# EAGLE board RadioMusic_B Rev2 (EAGLE 6.6.0)
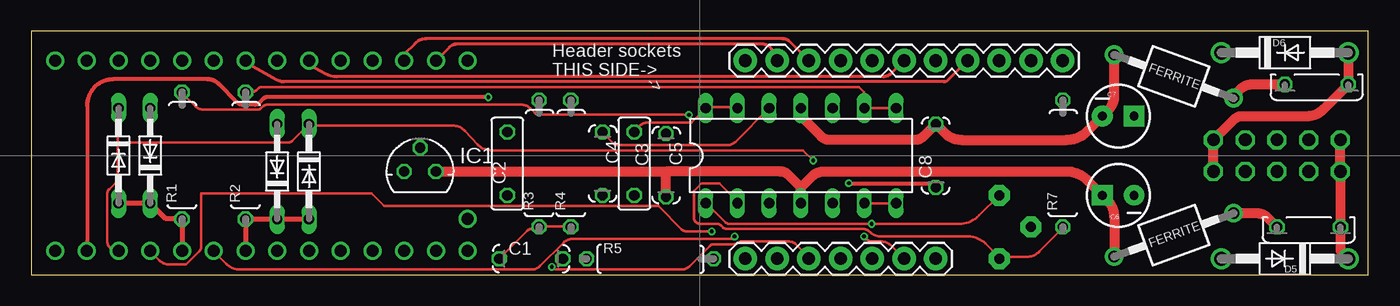
[diagram p0: board, top side]
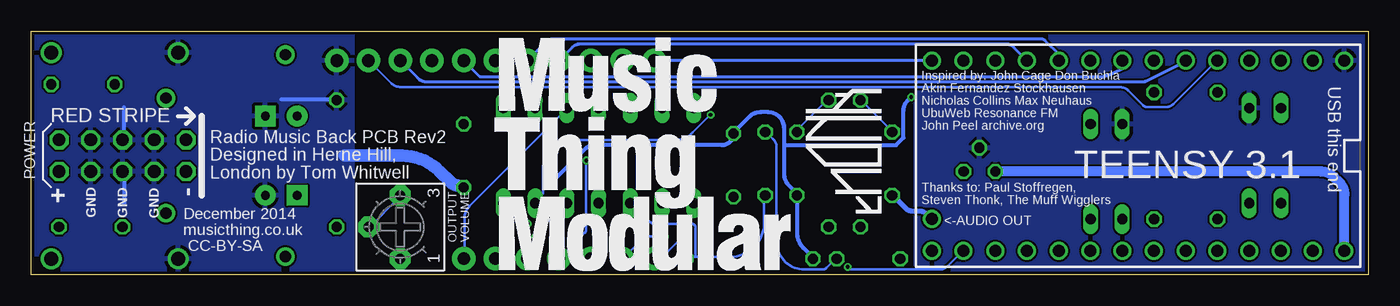
[diagram p1: board, bottom side, seen from below]

Size 107 x 19.5 mm. Coordinates in mm from the lower left corner, seen from the top.
Outline: 0,19.5 0,0 107,0 107,19.5 0,19.5
Copper layers (1*2*15*16): Top 0.035mm / dielectric 0.2mm / Route2 0.0175mm / dielectric 1.1mm / Route15 0.0175mm / dielectric 0.2mm / Bottom 0.035mm
Design rules "SeeedStudio_DRU_no_angle_20130527": minimum track width 6mil, minimum drill 12mil, track to track 6mil, track to pad 6mil, pad to pad 6mil, via to via 6mil, smd to smd 0mil, copper to edge 10mil, drill to drill 10mil, minimum pad ring 6mil, minimum via ring 6mil, stop-mask expansion 2mil, vias tented up to drill 25mil, thermal gap 10mil
Net classes: 0 default: width 0.203 mm; 1 power: width 0.305 mm; 2 ground: width 0.305 mm

## Footprints (pad centres in the part's own frame; a part is rotated, then mirrored left to right if it is on the bottom)
C050-024X044 = drill 0.813 octagon: 1 -2.54,0; 2 2.54,0
C050-025X075 = drill 0.813 octagon: 1 -2.54,0; 2 2.54,0
CPOL-RADIAL-10UF-25V = drill 0.7 pad 1.651 square: 1 1.27,0 | drill 0.7 pad 1.651: 2 -1.27,0
DO34-7 = drill 0.813 long: A 3.81,0; C -3.81,0
DO41-10 = drill 1.118: A 5.08,0; C -5.08,0
C050H075X075 = drill 0.813 octagon: 1 -2.54,0; 2 2.54,0
78LXX = drill 0.813 octagon: GND 0,1.905; IN 1.27,0; OUT -1.27,0
DIL14 = drill 0.813 long: 1 -7.62,-3.81; 2 -5.08,-3.81; 3 -2.54,-3.81; 4 0,-3.81; 5 2.54,-3.81; 6 5.08,-3.81; 7 7.62,-3.81; 8 7.62,3.81; 9 5.08,3.81; 10 2.54,3.81; 11 0,3.81; 12 -2.54,3.81; 13 -5.08,3.81; 14 -7.62,3.81
1X11 = drill 1.016 pad 1.88: 1 0,0; 2 2.54,0; 3 5.08,0; 4 7.62,0; 5 10.16,0; 6 12.7,0; 7 15.24,0; 8 17.78,0; 9 20.32,0; 10 22.86,0; 11 25.4,0
1X07 = drill 1.016 pad 1.88: 1 0,0; 2 2.54,0; 3 5.08,0; 4 7.62,0; 5 10.16,0; 6 12.7,0; 7 15.24,0
BL01RN1A = drill 0.9 pad 1.5: 1 -5.08,0; 2 5.08,0
3362P = drill 0.813 pad 1.676 octagon: 1 -2.54,0; 2 0,2.54; 3 2.54,0
0207/10 = drill 0.813 octagon: 1 -5.08,0; 2 5.08,0
MA05-2 = drill 1.016 octagon: 1 -5.08,-1.27; 2 -5.08,1.27; 3 -2.54,-1.27; 4 -2.54,1.27; 5 0,-1.27; 6 0,1.27; 7 2.54,-1.27; 8 2.54,1.27; 9 5.08,-1.27; 10 5.08,1.27
TEENSY_3.1_TW = drill 0.965: 0 -7.62,13.97; 1 -7.62,11.43; 2 -7.62,8.89; 3 -7.62,6.35; 3.3V 7.62,11.43; 4 -7.62,3.81; 5 -7.62,1.27; 6 -7.62,-1.27; 7 -7.62,-3.81; 8 -7.62,-6.35; 9 -7.62,-8.89; 10 -7.62,-11.43; 11 -7.62,-13.97; 12 -7.62,-16.51; 13 7.62,-16.51; 14/A0 7.62,-13.97; 15/A1 7.62,-11.43; 16/A2 7.62,-8.89; 17/A3 7.62,-6.35; 18/A4 7.62,-3.81; 19/A5 7.62,-1.27; 20/A6 7.62,1.27; 21/A7 7.62,3.81; 22/A8 7.62,6.35; 23/A9 7.62,8.89; AGND 7.62,13.97; DAC 5.08,-16.51; GND -7.62,16.51; VIN 7.62,16.51

## Placement (x,y rotation side)
C1  1n  [C050-024X044]  40.01,1.27 0 top
C2  100n  [C050-025X075]  38.1,8.89 90 top
C3  100n  [C050-025X075]  48.26,8.89 270 top
C4  1n  [C050-024X044]  45.72,8.89 270 top
C5  100n  [C050-024X044]  50.8,8.76 270 top
C6  10uf  [CPOL-RADIAL-10UF-25V]  87,6.35 180 top
C7  10uf  [CPOL-RADIAL-10UF-25V]  87,12.7 0 top
C8  100n  [C050-024X044]  72.39,9.53 90 top
D1  BAT42  [DO34-7]  6.99,9.53 270 top
D2  BAT42  [DO34-7]  9.53,9.53 90 top
D3  BAT42  [DO34-7]  22.23,8.26 270 top
D4  BAT42  [DO34-7]  19.68,8.26 90 top
D5  1N4001  [DO41-10]  100.33,1.27 180 top
D6  1N4001  [DO41-10]  100.33,17.78 0 top
F1  FUSE  [C050H075X075]  102.23,3.81 180 top
F2  FUSE  [C050H075X075]  102.87,15.24 180 top
IC1  [78LXX]  31.11,8.26 0 top
IC4  TL074  [DIL14]  61.59,9.53 0 top
JP1  M11PTH  [1X11]  82.55,17.14 180 top
JP3  [1X07]  57.15,1.27 0 top
L1  BL01RN1A  [BL01RN1A]  91.44,3.17 20 top
L2  BL01RN1A  [BL01RN1A]  91.44,15.88 340 top
OUTPUT  50k  [3362P]  77.47,3.81 90 bottom
R1  47R  [0207/10]  12.06,9.53 90 top
R2  47R  [0207/10]  17.14,9.53 90 top
R3  8.2k  [0207/10]  40.64,8.89 90 top
R4  8.2k  [0207/10]  43.18,8.89 90 top
R5  330K  [0207/10]  49.53,1.27 0 top
R7  1k  [0207/10]  82.55,8.89 90 top
SV1  [MA05-2]  99.69,9.53 180 bottom
U1  TEENSY_3.1_TW  [TEENSY_3.1_TW]  18.41,9.53 270 bottom
U$2  [THONK_1CM_SCREENPRINT]  38.96,4.9 90 bottom
U$4  [MTM_2CM]  70.08,-0.64 0 bottom

## Library data of the parts
C1-C5 C8 F1 F2 R1-R5 R7 U1 = TomW
C6 C7 = SparkFun-Passives
D1-D6 = diode
IC1 = v-reg
IC4 = linear
JP1 JP3 = SparkFun-Connectors
L1 L2 = inductors
OUTPUT = bourns
SV1 = TomW; OC_FARNELL: unknown; OC_NEWARK: unknown
U$2 U$4 = TW_logos

## Nets
+3.3V: D1.C D3.C JP3.4 U1.3.3V
+5V: IC1.OUT U1.VIN
+12V [power]: C5.2 C6.1 IC1.IN IC4.4 L1.1
+12V_INLET [power]: D5.C F1.1 SV1.9 SV1.10
-12V [power]: C7.2 C8.2 IC4.11 L2.1
-12V_INLET [power]: D6.A F2.1 SV1.1 SV1.2
AUDIO_OUT: IC4.1 JP3.5 OUTPUT.2 OUTPUT.3
CHANNEL_CV: IC4.5 JP3.6
CHANNEL_POT: JP3.1 U1.23/A9
DAC: C2.1 U1.DAC
DGND: D2.A D4.A IC1.GND U1.GND
GND [ground]: C4.2 C5.1 C6.2 C7.1 C8.1 D5.A D6.C JP1.1 R5.1 R7.2 SV1.3 SV1.4 SV1.5 SV1.6 SV1.7 SV1.8 U1.AGND
LED1: JP1.2 U1.3
LED2: JP1.3 U1.4
LED3: JP1.4 U1.5
LED4: JP1.5 U1.6
LED_RESET: JP1.10 U1.11
MISO: JP1.11 U1.12
MOSI: JP1.6 U1.7
N$1: IC4.8 IC4.9 R2.2
N$2: C4.1 IC4.12 R4.2
N$3: IC4.6 IC4.7 R1.2
N$4: C1.1 R3.1 R4.1
N$5: C1.2 C3.1 IC4.13 IC4.14
N$6: C3.2 IC4.3 R5.2
N$7: IC4.2 OUTPUT.1 R7.1
N$10: C2.2 R3.2
N$22 [power]: F1.2 L1.2
N$23 [power]: F2.2 L2.2
PIN20/A6: D3.A D4.C R2.1 U1.20/A6
PIN22/A8: D1.A D2.C R1.1 U1.22/A8
RESET_CV: JP1.8 U1.9
RESET_SW: JP1.7 U1.8
SCLK: JP3.3 U1.14/A0
SS: JP1.9 U1.10
TIME_CV: IC4.10 JP3.7
TIME_POT: JP3.2 U1.21/A7

## Tracks (layer width: path | path; a pad name or v marks a point on that pad's centre or on a via)
+3.3V  (via drill 0.3)
  Top 0.203: v62.59,9.14 61.77,9.96 36.79,9.96 arc-47 35.71,10.43 34.71,11.51 arc47 33.74,11.94 22.35,11.94 D3.C 20.86,10.7 arc-45 20.53,10.57 6.91,10.57 | 6.91,10.57 6.91,7.52 arc-90 6.71,7.32 6.22,6.83 arc45 6.1,6.53 6.1,2.6 arc90 6.66,2.03 6.91,2.03 U1.3.3V | 6.91,10.57 6.91,13.21 D1.C
  Bottom 0.203: v62.59,9.14 62.59,3.64 arc45 62.72,3.32 JP3.4
+5V
  Bottom 0.813: U1.VIN 1.91,6.4 arc-45 2.32,7.4 2.76,7.84 arc-45 3.76,8.26 IC1.OUT
+12V
  Top 0.813: L1.1 86.67,4.64 arc45 86.12,5.95 C6.1 84.49,7.58 arc45 82.87,8.26 63.45,8.26 arc45 62.45,7.84 61.59,6.99 | IC4.4 61.59,6.99 | 61.59,6.99 60.59,7.99 arc45 59.95,8.26 50.8,8.26 | C5.2 50.8,8.26 | IC1.IN 50.8,8.26
+12V_INLET
  Top 0.813: SV1.9 SV1.10 F1.1 104.78,1.91 D5.C
-12V
  Top 0.813: L2.1 86.67,14.31 arc-45 86.19,13.17 C7.2 84.49,11.47 arc-45 82.87,10.79 74.45,10.79 arc-45 73.1,11.35 C8.2 71.38,11.06 arc-45 70.75,10.79 63.87,10.79 arc-45 63.24,11.06 61.59,12.7 IC4.11
-12V_INLET
  Top 0.813: D6.A F2.1 103.4,13.23 arc-45 102.13,12.7 96.89,12.7 arc45 96.26,12.44 SV1.1 SV1.2
AUDIO_OUT  (via drill 0.3)
  Top 0.203: OUTPUT.3 75.84,4.72 arc-45 74.25,4.06 v67.26,4.06 55.86,4.06 arc-45 55.55,4.19 54.05,5.69 IC4.1
  Bottom 0.203: OUTPUT.2 79.86,3.86 77.62,6.1 77.62,6.3 OUTPUT.3 | v67.26,4.06 67.26,1.42 JP3.5
CHANNEL_CV  (via drill 0.3)
  Top 0.203: v66.65,3.05 66.88,2.81 arc45 67.3,2.64 68.1,2.64 arc-45 68.75,2.38 JP3.6
  Bottom 0.203: v66.65,3.05 66.65,3.25 64.21,5.69 IC4.5
CHANNEL_POT  (via drill 0.3)
  Top 0.203: v54.46,3.45 52.47,3.45 arc-45 52.05,3.63 50.19,5.49 28.25,5.49 27.23,6.5 13.61,6.5 13.61,2.27 arc-45 13.45,1.86 12.39,0.81 11.03,0.81 arc-45 10.24,1.14 9.55,1.83 U1.23/A9
  Bottom 0.203: v54.46,3.45 56.49,1.42 57.1,1.42 JP3.1
DAC
  Bottom 0.203: 38,6.3 C2.1
  Bottom 0.406: U1.DAC 35.3,4.82 arc-45 35.93,5.08 36.52,5.08 arc45 36.97,5.27 38,6.3
DGND
  pour Bottom: -1.27,-1.27 36.2,-1.27 36.2,20.95 -1.27,20.95
GND  (via drill 0.3)
  Top 0.305: v36.58,14.22 18.88,14.22 arc45 18.57,14.1 18.22,13.75 arc-45 17.89,13.61 16.91,13.61 arc-45 16.49,13.79 14.99,15.29 arc45 14.12,15.65 6.56,15.65 arc90 4.47,13.56 4.47,2.03 U1.AGND | v65.43,7.32 72.14,7.32 72.34,7.11 C8.1
  Bottom 0.305: 99.57,5.69 99.57,8.13 SV1.6 | 95.3,1.42 D5.A | 99.57,10.97 99.57,13.41 | 95.3,17.68 D6.C | 72.54,7.11 C8.1 | 82.5,17.07 JP1.1 | 86.97,14.02 82.7,14.02 R7.2 | 88.19,12.8 C7.1 | R5.1 44.5,1.42 45.22,2.14 arc45 45.72,3.36 C4.2 45.72,6.5 46.37,7.15 arc45 46.74,8.04 46.74,10.36 | 46.74,10.36 46.74,11.71 arc-90 48.03,13.01 48.63,13.01 arc-45 49.56,12.62 50.8,11.38 C5.1 arc90 51.74,10.36 61.91,10.36 arc-45 62.72,10.03 v65.43,7.32 | v36.58,14.22 36.88,13.92 arc-45 37.19,13.18 37.19,10.97 37.8,10.36 46.74,10.36
  Bottom 1.016: 72.54,7.11 72.68,7.11 arc45 73.49,7.45 74.32,8.28 arc-45 77.33,9.53 81.92,9.53
  pour Bottom: 81.28,20.32 107.95,20.32 107.95,-1.27 81.28,-1.27
LED1
  Bottom 0.203: U1.3 12.12,17.14 15.6,13.66 arc45 16.21,13.41 17.65,13.41 arc45 18.05,13.58 19.19,14.72 arc-45 19.95,15.04 77.51,15.04 arc45 78.18,15.31 JP1.2
LED2
  Bottom 0.254: JP1.3 76.09,15.76 arc-45 75.32,15.44 18.16,15.44 arc-27 17.63,15.57 14.61,17.09 U1.4
LED3
  Top 0.254: JP1.4 73.37,15.58 arc-45 73.03,15.44 20.21,15.44 arc-29 19.65,15.59 17.14,16.99 U1.5
LED4
  Bottom 0.254: JP1.5 71.12,15.88 arc-90 71.09,15.85 21.41,15.85 arc-24 20.88,15.96 19.68,16.48 U1.6
LED_RESET
  Top 0.254: U1.11 33.47,18.23 arc-45 34.11,18.49 58.5,18.49 arc-52 59.19,18.16 59.69,17.53 JP1.10
MISO
  Bottom 0.254: U1.12 JP1.11
MOSI
  Top 0.254: JP1.6 68.82,16.11 arc-45 68.18,15.85 24.46,15.85 arc-28 23.55,16.08 22.23,16.79 U1.7
N$1
  Top 0.203: R2.2 17.59,14.61 arc45 18.04,14.79 18.16,14.9 arc-45 18.47,15.04 66.24,15.04 66.65,14.63 66.65,13.36 IC4.9 IC4.8
N$2
  Top 0.203: IC4.12 56.36,10.64 arc-45 55.69,10.36 46.94,10.36 arc-45 46.59,10.51 45.72,11.38 C4.1
  Bottom 0.203: C4.1 45.72,11.58 43.28,14.02 R4.2
N$3  (via drill 0.3)
  Top 0.203: IC4.6 66.85,5.69 69.09,5.69 IC4.7 | v52.63,12.8 40.67,12.8 arc-45 40.27,12.97 39.9,13.34 arc45 39.23,13.61 18.88,13.61 arc45 18.56,13.48 18.44,13.36 arc-45 18.07,13.21 13.8,13.21 arc-45 13.13,13.48 12.19,14.43 R1.2
  Bottom 0.203: v52.63,12.8 54.07,11.36 arc45 55.5,10.77 63.76,10.77 arc-90 66.04,8.49 66.04,6.5 66.65,5.89 IC4.6
N$4
  Top 0.203: C1.1 37.59,1.42 39.68,3.51 arc-45 40.04,3.66 40.64,3.66 R3.1 40.64,3.86 43.08,3.86 R4.1
N$5
  Top 0.203: IC4.13 56.49,13.41 54.05,13.41 IC4.14 52.83,12.19 49.36,12.19 arc45 48.69,11.91 48.36,11.58 C3.1
  Bottom 0.203: C1.2 42.67,1.22 43.37,0.52 arc45 43.65,0.41 45.13,0.41 arc90 47.35,2.62 47.35,10.15 arc-45 47.64,10.86 48.16,11.38 C3.1
N$6
  Bottom 0.203: 53.85,1.42 51.02,1.42 arc-90 48.36,4.08 48.36,6.3 C3.2 | 53.85,1.42 54.46,1.42 R5.2 | 53.85,1.42 53.85,3.78 arc-90 54.13,4.06 57.13,4.06 arc45 57.42,4.18 58.93,5.69 IC4.3
N$7
  Top 0.203: IC4.2 56.49,5.89 55.07,7.32 53.65,7.32 53.03,6.71 53.03,4.55 arc90 53.52,4.06 54.85,4.06 arc-45 55.22,3.91 55.35,3.79 arc45 55.65,3.66 66.57,3.66 arc-45 67.05,3.46 arc45 68.04,3.05 75.01,3.05 arc-45 76.35,2.5 77.42,1.42 OUTPUT.1 77.62,1.42 79.67,1.42 arc45 80.68,1.84 82.5,3.66 R7.1
N$10
  Bottom 0.203: C2.2 38.2,11.58 40.64,14.02 R3.2
N$22
  Top 0.813: F1.2 98.99,4.51 arc45 98.03,4.91 L1.2
N$23
  Top 0.813: F2.2 97.74,15.24 arc45 96.74,14.82 96.21,14.3 L2.2
PIN20/A6
  Top 0.203: 19.51,4.47 D4.C 19.71,4.47 | 17.27,4.47 R2.1 | 22.15,4.47 D3.A
  Top 0.406: R2.1 U1.20/A6 | 17.27,4.47 19.51,4.47 | 19.71,4.47 22.15,4.47
PIN22/A8
  Top 0.203: 7.11,5.69 D1.A | 9.35,5.69 D2.C | 11.99,4.47 R1.1
  Top 0.406: R1.1 U1.22/A8 | 9.35,5.69 7.11,5.69 | D2.C 10.77,4.47 11.99,4.47
RESET_CV
  Bottom 0.254: JP1.8 63.69,18.23 arc45 63.05,18.49 29.03,18.49 arc45 28.39,18.23 U1.9
RESET_SW
  Bottom 0.254: JP1.7 65.83,18.63 arc45 65.17,18.9 26.21,18.9 arc45 25.87,18.76 24.77,17.65 U1.8
SCLK  (via drill 0.3)
  Top 0.203: v41.66,0.61 41.86,0.41 52.04,0.41 arc45 52.7,0.68 54.3,2.28 arc-45 54.69,2.44 56.29,2.44 arc45 56.63,2.58 arc-45 56.78,2.64 60.69,2.64 arc-45 61.15,2.45 62.18,1.42 JP3.3
  Bottom 0.203: v41.66,0.61 41.66,0.41 34.32,0.41 arc-45 33.66,0.68 32.51,1.83 U1.14/A0
SS
  Top 0.254: JP1.9 60.75,18.63 arc45 60.09,18.9 31.63,18.9 arc45 30.71,18.52 29.84,17.65 U1.10
TIME_CV
  Bottom 0.203: IC4.10 64.21,13.21 71.94,5.48 arc-45 72.34,4.51 72.34,1.42 JP3.7
TIME_POT  (via drill 0.3)
  Top 0.203: v56.29,3.05 56.08,2.85 43.28,2.85 arc45 42.59,2.56 40.72,0.69 arc-45 40.04,0.41 16.7,0.41 arc-45 15.59,0.86 14.63,1.83 U1.21/A7
  Bottom 0.203: v56.29,3.05 57.91,3.05 arc-90 58.52,2.44 JP3.2

## Text on the board
tPlace: -> | Header sockets / THIS SIDE->
bPlace: Inspired by: John Cage Don Buchla / Akin Fernandez Stockhausen / Nicholas Collins Max Neuhaus / UbuWeb Resonance FM / John Peel archive.org / / / / / Thanks to: Paul Stoffregen, / Steven Thonk, The Muff Wigglers | USB this end | TEENSY 3.1 | Radio Music Back PCB Rev2 / Designed in Herne Hill, / London by Tom Whitwell | <-AUDIO OUT | OUTPUT / VOLUME | December 2014 / musicthing.co.uk / CC-BY-SA